# Altium PCB ESP-OLED.PcbDoc
Units mm, origin at the board's own origin, x right, y up, seen from the top; angles counter-clockwise.
Board outline 30.99 x 15.24 mm, 2 copper layers (Top Layer, Bottom Layer); 14 components, 13 nets, 75 pads, 0 vias.
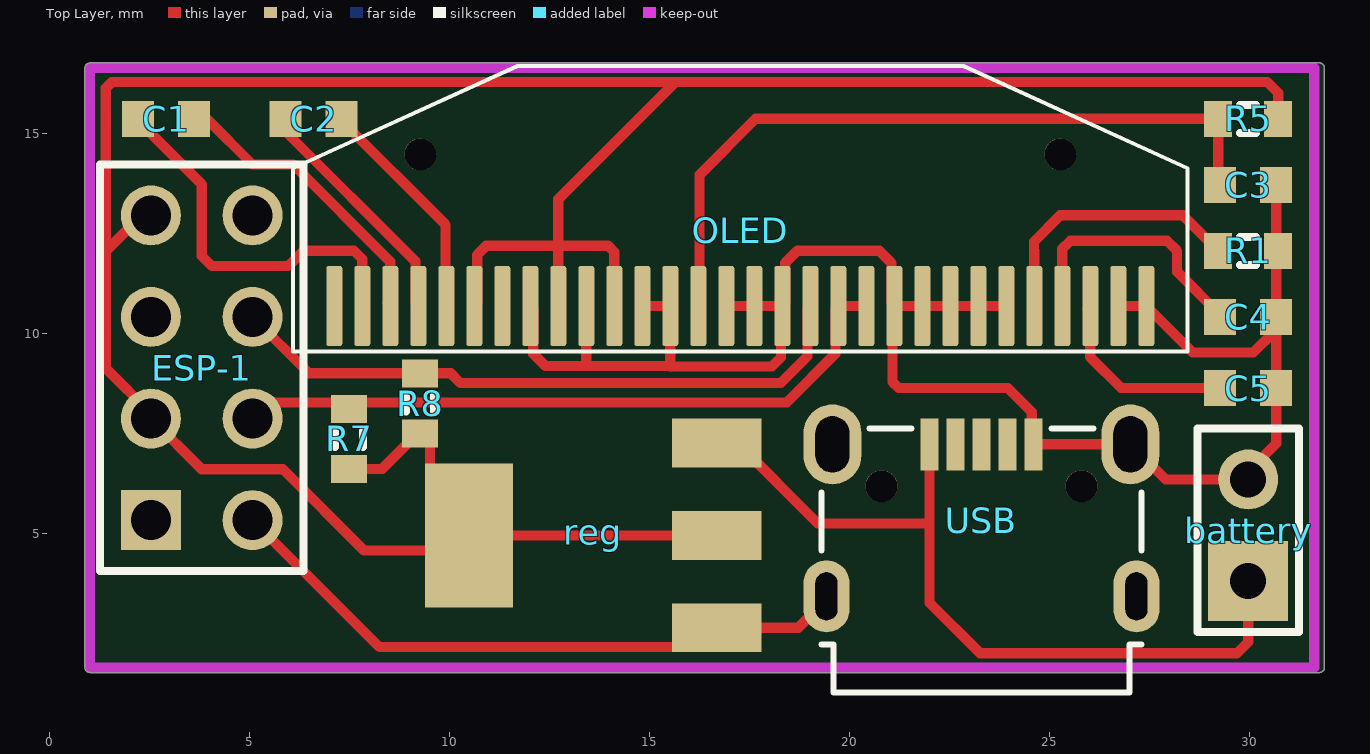
[diagram p0: Top Layer view]
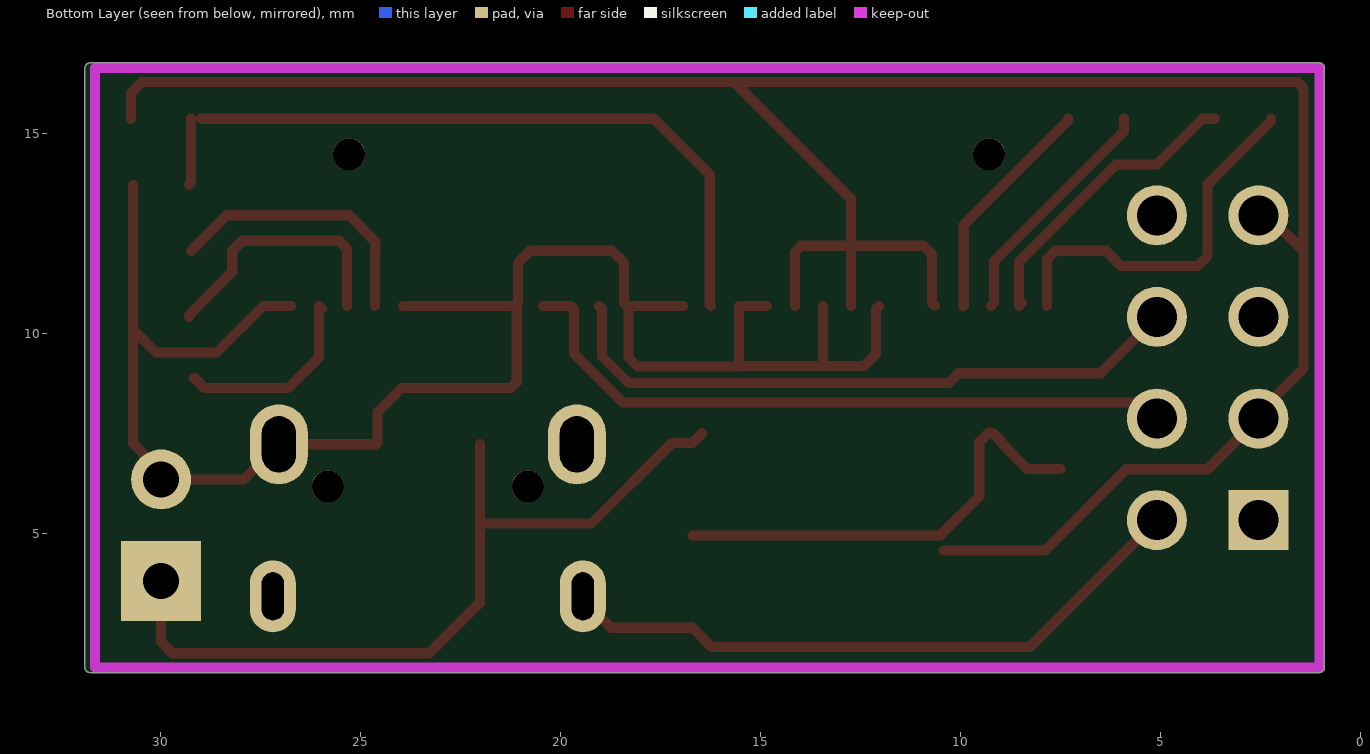
[diagram p1: Bottom Layer view, seen from below]

## Layer stack, top to bottom
Top Solder: solder mask 0.0102, Solder Resist, Dk 3.5
Top Layer: signal copper 0.0356
Dielectric 1: dielectric 0.32, FR-4, Dk 4.8
Bottom Layer: signal copper 0.0356
Bottom Solder: solder mask 0.0102, Solder Resist, Dk 3.5

## Board outline
1.016,1.524 cw(c1.016,1.651) 0.889,1.651 0.889,16.637 cw(c1.016,16.637) 1.016,16.764 31.75,16.764 cw(c31.75,16.637) 31.877,16.637 31.877,1.651 cw(c31.75,1.651) 31.75,1.524

## Design rules (kind name [scope] priority, off if disabled: settings)
Clearance [All] p1: gap=0.254 ignorepadtopadclearanceinfootprint=FALSE except(0: SMDPad-SMDPad; 0.1: Arc-Arc Arc-Track Track-Track)
ComponentClearance [All] p1: gap=0 collisioncheckmode=3 verticalgap=0 showdistances=TRUE
PolygonConnect [All] p1: connectstyle=Relief reliefconductorwidth=0.254 reliefentries=4 polygonreliefangle="90 Angle" airgapwidth=0.254
RoutingVias [All] p1: holewidth=0.711 width=1.27 viastyle="Through Hole" minholewidth=0.711 minwidth=1.27 maxholewidth=0.711 maxwidth=1.27
SolderMaskExpansion [All] p1: expansion=0.102
Width [All] p1: maxlimit=0.254 minlimit=0.254 preferedwidth=0.254
29 further rules are at their usual default settings.

## Components (designator, comment, footprint, x,y, rotation, side; value= is the part's Value field where it differs from the comment)
battery "Header 2" HDR1X2 29.972,3.81 r90 top
C1 "Cap Semi" 1608[0603] 2.921,15.367 r180 top value=1.2uF
C2 "Cap Semi" 1608[0603] 6.604,15.367 r180 top value=0.1uF
C3 "Cap Semi" 1608[0603] 29.972,13.716 r180 top value=10uF
C4 "Cap Semi" 1608[0603] 29.972,10.414 r0 top value=10uF
C5 "Cap Semi" 1608[0603] 29.972,8.636 r0 top value=10uF
ESP-1 "Header 4X2" ESP-01 1.27,4.064 r0 top
OLED "OLED" oled0.96_no3d 27.423,10.688 r180 top
R1 "Res3" J1-0603 29.972,12.065 r0 top value=390k
R5 "Res3" J1-0603 29.972,15.367 r0 top value=4.7k
R7 "Res3" J1-0603 7.493,7.366 r270 top value=10K
R8 "Res3" J1-0603 9.271,8.255 r270 top value=10K
reg "AMS1117-3.3" SOT223 13.589,4.953 r180 top
USB "Micro USB 2.0 Type B Receptacle" 629105150521 23.303,4.329 r0 top

## Footprints (in the part's own frame and the unit in brackets; to place one, negate y for a bottom-side part, rotate by r counter-clockwise, add the part's x,y. Pads: shape width x height; smd on the part's side, far side on the other; paste and mask are expansions set on the pad)
1608[0603] [mm] "Chip Capacitor, Body 1.6x0.8mm, IPC High Density"
  rect 0.8x0.9 smd: 1(-0.7,0) 2(0.7,0)
  body extent -0.87,-0.48 0.87,0.48, height 1.3
629105150521 [mm] "Micro USB 2.0 SMT Type B Horizontal 5 Contacts High Current"
  rect 0.45x1.3 smd: 1(-1.3,2.9) 2(-0.65,2.9) 3(0,2.9) 4(0.65,2.9) 5(1.3,2.9)
  round 0.8 hole 0.8 unplated: MH1(-2.5,1.85) MH2(2.5,1.85)
  oval 1.45x2 hole 0.85 slot 1.4 at 90 deg: S1(-3.725,2.9) S2(3.725,2.9)
  oval 1.15x1.8 hole 0.55 slot 1.2 at 90 deg: S3(-3.875,-0.9) S4(3.875,-0.9)
  silkscreen extent -4,-3.3 4,3.3, body extent -4,-3.3 4,3.3, height 2.75
ESP-01 [mm]
  rect 1.5x1.5 hole 1: 1(1.27,1.27)
  round 1.5 hole 1: 2(3.81,1.27) 3(1.27,3.81) 4(3.81,3.81) 5(1.27,6.35) 6(3.81,6.35) 7(1.27,8.89) 8(3.81,8.89)
  silkscreen extent 0,0 5.08,10.16, body extent -0.25,-2.54 24.55,12.34, height 11.5
HDR1X2 [mm] "Connector; Header; 2 Position"
  rect 2x2 hole 0.9: 1(0,0)
  round 1.5 hole 0.9: 2(2.54,0)
  silkscreen extent -1.27,-1.27 3.81,1.27
J1-0603 [mm] "Chip Resistor, Body 1.6x0.8mm, IPC High Density"
  rect 0.7x0.9 smd: 1(-0.75,0) 2(0.75,0)
  silkscreen extent -0.2,-0.35 0.2,0.35, body extent -0.85,-0.48 0.85,0.48, height 0.9
oled0.96_no3d [mm]
  round 0.8 hole 0.8 unplated: 0(2.15,-3.79) 0(18.15,-3.79)
  rrect30% 0.4x2 smd: 1(20.3,0) 2(19.6,0) 3(18.9,0) 4(18.2,0) 5(17.5,0) 6(16.8,0) 7(16.1,0) 8(15.4,0) 9(14.7,0) 10(14,0) 11(13.3,0) 12(12.6,0) 13(11.9,0) 14(11.2,0) 15(10.5,0) 16(9.8,0) 17(9.1,0) 18(8.4,0) 19(7.7,0) 20(7,0) 21(6.3,0) 22(5.6,0) 23(4.9,0) 24(4.2,0) 25(3.5,0) 26(2.8,0) 27(2.1,0) 28(1.4,0) 29(0.7,0) 30(0,0)
  silkscreen extent -1.03,-6 21.33,1.14
SOT223 [mil]
  rect 88x48 smd: 1(-122,91) 2(-122,0) 3(-122,-91)
  rect 86.61x141.73 smd: 2(122.01,0)
  body extent -144,-130 144,134, height 75

## Part data
battery: "Header, 2-Pin", LatestRevisionDate=17-Jul-2002, LatestRevisionNote="Re-released for DXP Platform.", Publisher="Altium Limited"
C1 C2 C3 C4 C5: "Capacitor (Semiconductor SIM Model)", LatestRevisionDate=29-May-2009, LatestRevisionNote="IPC-7351 Footprint Added.", PackageDescription="Chip Capacitor", PackageReference=C1206, Published=8-Jun-2000, Publisher="Altium Limited"
ESP-1: "Header, 4-Pin, Dual row", LatestRevisionDate=17-Jul-2002, LatestRevisionNote="Re-released for DXP Platform.", Publisher="Altium Limited"
OLED: library part OLED0.96
R1 R5 R7 R8: "Resistor", LatestRevisionDate=29-May-2009, LatestRevisionNote="IPC-7351 Footprint Added.", PackageDescription="Chip Resistor", PackageReference=J1-0603, Published=8-Jun-2000, Publisher="Altium Limited"
USB: library part 629105150521, "Micro USB 2.0 Type B, Receptacle, Horizontal, SMT, with Pegs", Operating Temperature="-40 to +85degC", Rated Current=3A, Working Voltage=30VAC, Application="Micro USB 2.0", ComponentLink1Description=Manufacturer, ComponentLink1URL=http://www.we-online.de, ComponentLink2Description=Datasheet, ComponentLink2URL=https://katalog.we-online.com/em/datasheet/629105150521.pdf, Gender=Receptacle, Interface Type="Type B", Mounting Technology=SMT, Packaging="Tape and Reel", Part Number=629105150521, Pin Number=5, Published Date="September 2019", Publisher="Wurth Elektronik", Type=Horizontal

## Nets (pads, with @x,y where several pads share a name; then routed paths per layer and width w, separated by ;. In a path a pad name is that pad's centre, name@x,y a point inside that pad or via, vN(x,y) a via of type N, cw(c..) or ccw(c..) an arc to the next point about the centre after c; other vN are vias at no path point)
+5: battery.1 reg.3 USB.1 | length 20.6
  Top Layer w0.254: reg.3@16.447,7.505 reg.3 17.196,7.264 19.211,5.25 22.003,5.25 ; USB.1 22.003,5.25 ; battery.1 29.972,2.286 29.691,2.005 23.268,2.005 22.003,3.27 22.003,5.25
GND: battery.2 C3.1 C4.2 C5.2 ESP-1.2 OLED.8 OLED.10 OLED.12 OLED.13 OLED.15 OLED.16 OLED.17 OLED.21 OLED.22 OLED.23 OLED.24 OLED.25 OLED.29 OLED.30 R1.2 reg.1 USB.5 USB.S1 USB.S2 USB.S3 USB.S4 | length 62.6
  Top Layer w0.254: ESP-1.2 8.255,2.159 16.205,2.159 reg.1 18.723,2.642 19.428,3.346 USB.S3 ; OLED.8 12.096,10.615 12.096,9.494 12.407,9.183 13.423,9.183 ; OLED.10 13.423,9.183 ; OLED.12 OLED.13 15.523,9.183 13.423,9.183 ; 15.523,9.173 18.063,9.173 18.288,9.398 18.288,10.653 18.253,10.688 OLED.16 OLED.15 ; OLED.17 18.396,10.761 18.396,11.765 18.7,12.069 20.746,12.069 21.05,11.765 21.05,10.761 OLED.21 ; OLED.25 OLED.24 OLED.23 OLED.22 OLED.21 ; OLED.29 OLED.30 28.586,9.525 30.099,9.525 C4.2@30.607,10.033 ; C3.1 C5.2 30.672,7.249 29.972,6.549 battery.2 27.907,6.35 USB.S2 USB.5 24.559,7.273 24.559,8.037 23.96,8.636 21.231,8.636 21.082,8.785 21.082,10.647 OLED.21
NetC1_1: C1.1 OLED.3 | length 7.6
  Top Layer w0.254: C1.1 3.937,15.367 5.08,14.224 6.096,14.224 8.523,11.797 OLED.3 OLED.3@8.45,10.761
NetC1_2: C1.2 OLED.2 | length 9.6
  Top Layer w0.254: C1.2 2.221,15.317 3.81,13.728 3.81,11.938 4.064,11.684 5.969,11.684 6.354,12.069 7.616,12.069 7.823,11.862 OLED.2
NetC2_1: C2.1 OLED.5 | length 5.8
  Top Layer w0.254: C2.1 7.304,15.317 9.906,12.715 9.906,10.705 OLED.5
NetC2_2: C2.2 OLED.4 | length 6.1
  Top Layer w0.254: C2.2 5.904,15.051 9.15,11.805 9.15,10.761 OLED.4
NetC3_2: C3.2 OLED.14 R5.1 | length 18.3
  Top Layer w0.254: OLED.14 16.256,10.721 16.256,13.97 17.653,15.367 R5.1@28.968,15.367 ; R5.1 29.222,13.766 C3.2
NetC4_1: C4.1 OLED.27 | length 6.6
  Top Layer w0.254: OLED.27 25.323,12.115 25.527,12.319 27.94,12.319 28.194,12.065 28.194,11.542 29.272,10.464 C4.1
NetC5_1: C5.1 OLED.28 | length 4.9
  Top Layer w0.254: OLED.28@25.95,10.615 OLED.28 26.023,9.41 26.797,8.636 28.891,8.636 C5.1@29.145,8.89
NetOLED_26: OLED.26 R1.1 | length 6.9
  Top Layer w0.254: OLED.26 24.623,12.069 24.616,12.076 24.616,12.297 25.273,12.954 28.333,12.954 R1.1
SCL: ESP-1.6 OLED.18 R8.1 | length 16.1
  Top Layer w0.254: ESP-1.6 6.489,9.005 R8.1 10.033,9.005 10.275,8.763 18.288,8.763 18.95,9.425 18.95,10.615 OLED.18
SDA: ESP-1.4 OLED.19 OLED.20 R7.1 | length 17.2
  Top Layer w0.254: ESP-1.4 5.48,8.274 18.434,8.274 19.65,9.49 19.65,10.615 OLED.19 OLED.20
VCC: ESP-1.3 ESP-1.7 OLED.6 OLED.9 OLED.11 R5.2 R7.2 R8.2 reg.2 | length 74.1
  Top Layer w0.254: ESP-1.7 2.31,12.954 1.409,12.053 ; R7.2 8.324,6.616 8.948,7.24 8.948,7.282 9.171,7.505 R8.2 9.294,7.505 9.517,7.282 9.517,5.926 10.49,4.953 reg.2@16.688,4.953 ; reg.2@10.406,4.572 7.874,4.572 5.842,6.604 3.81,6.604 ESP-1.3 2.54,8.001 1.409,9.132 1.409,12.053 ; OLED.6 10.696,10.761 10.696,11.966 10.922,12.192 12.723,12.192 ; OLED.9 12.723,12.192 ; OLED.11 14.123,12.039 13.97,12.192 12.723,12.192 ; 15.621,16.256 12.723,13.358 12.723,12.192 ; R5.2 30.722,16.014 30.453,16.283 1.558,16.283 1.409,16.134 1.409,12.053
pads on no net: ESP-1.1 ESP-1.5 ESP-1.8 OLED.0 OLED.1 OLED.7 USB.2 USB.3 USB.4 USB.MH1 USB.MH2

## Polygon pours and split planes (outlines as drawn)
no net on Top Layer "Top Layer-No Net" (solid, pour order 4): 24.969,16.51

## Keep-outs
Keep-Out Layer:
  lines w0.254: 1.016,1.651 31.623,1.651 31.623,16.637 1.016,16.637 1.016,1.651

## Text inside footprints (layer, text, board x,y; h text height)
USB: Mechanical 2 "PCB Edge" at 22.003,1.029 h0.41